# EAGLE board DA_uno_shield_0_2 (EAGLE 7.5.0)
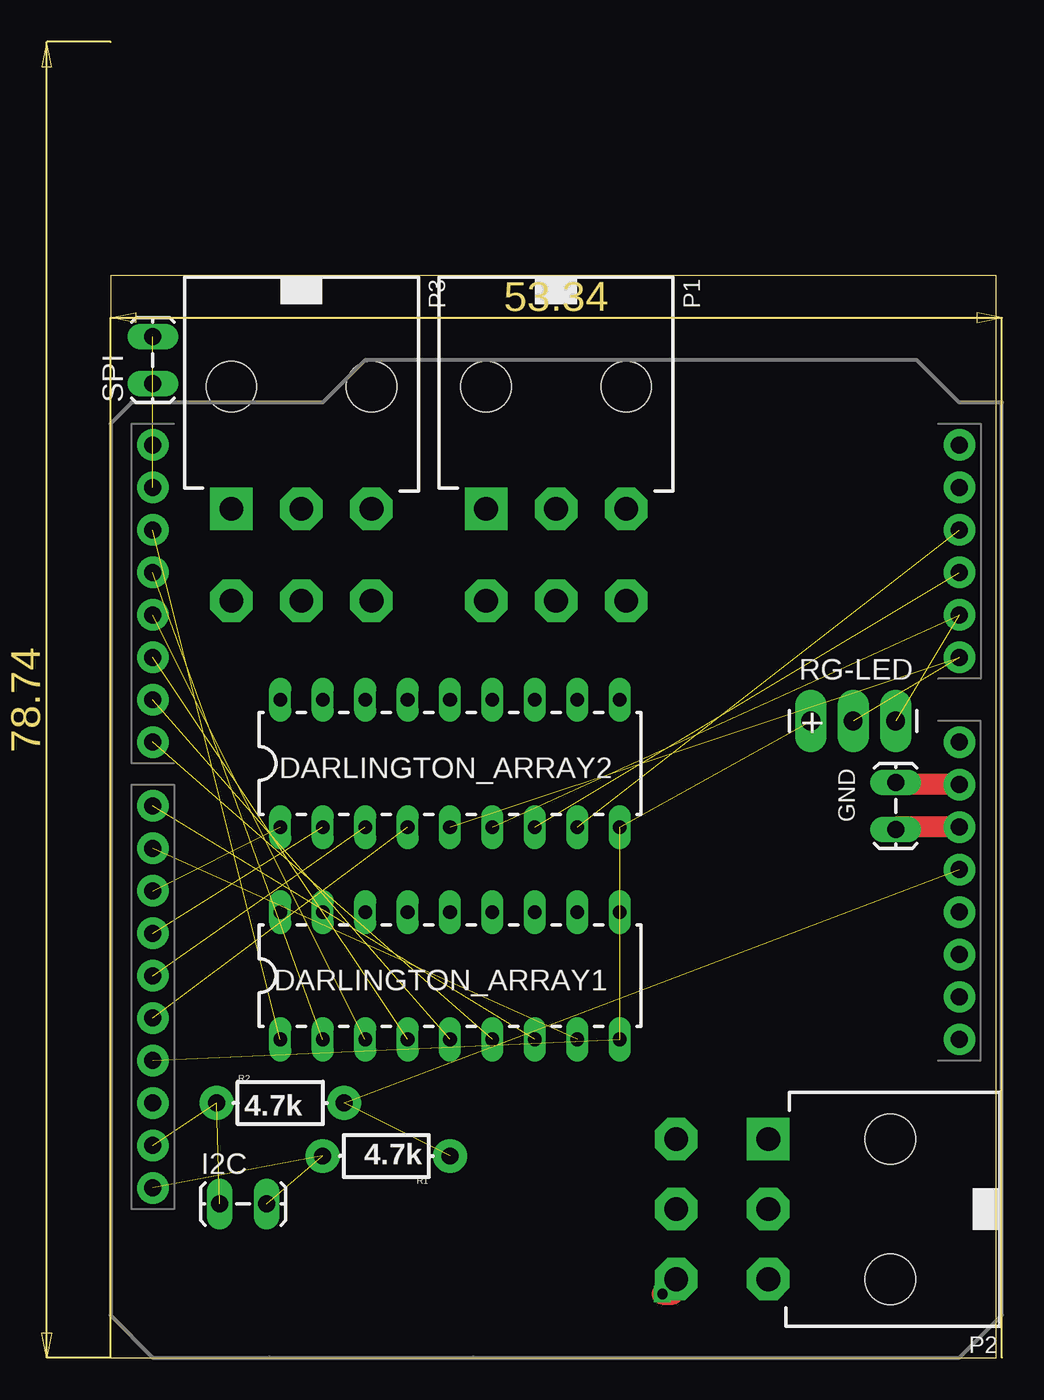
[diagram p0: board, top side]
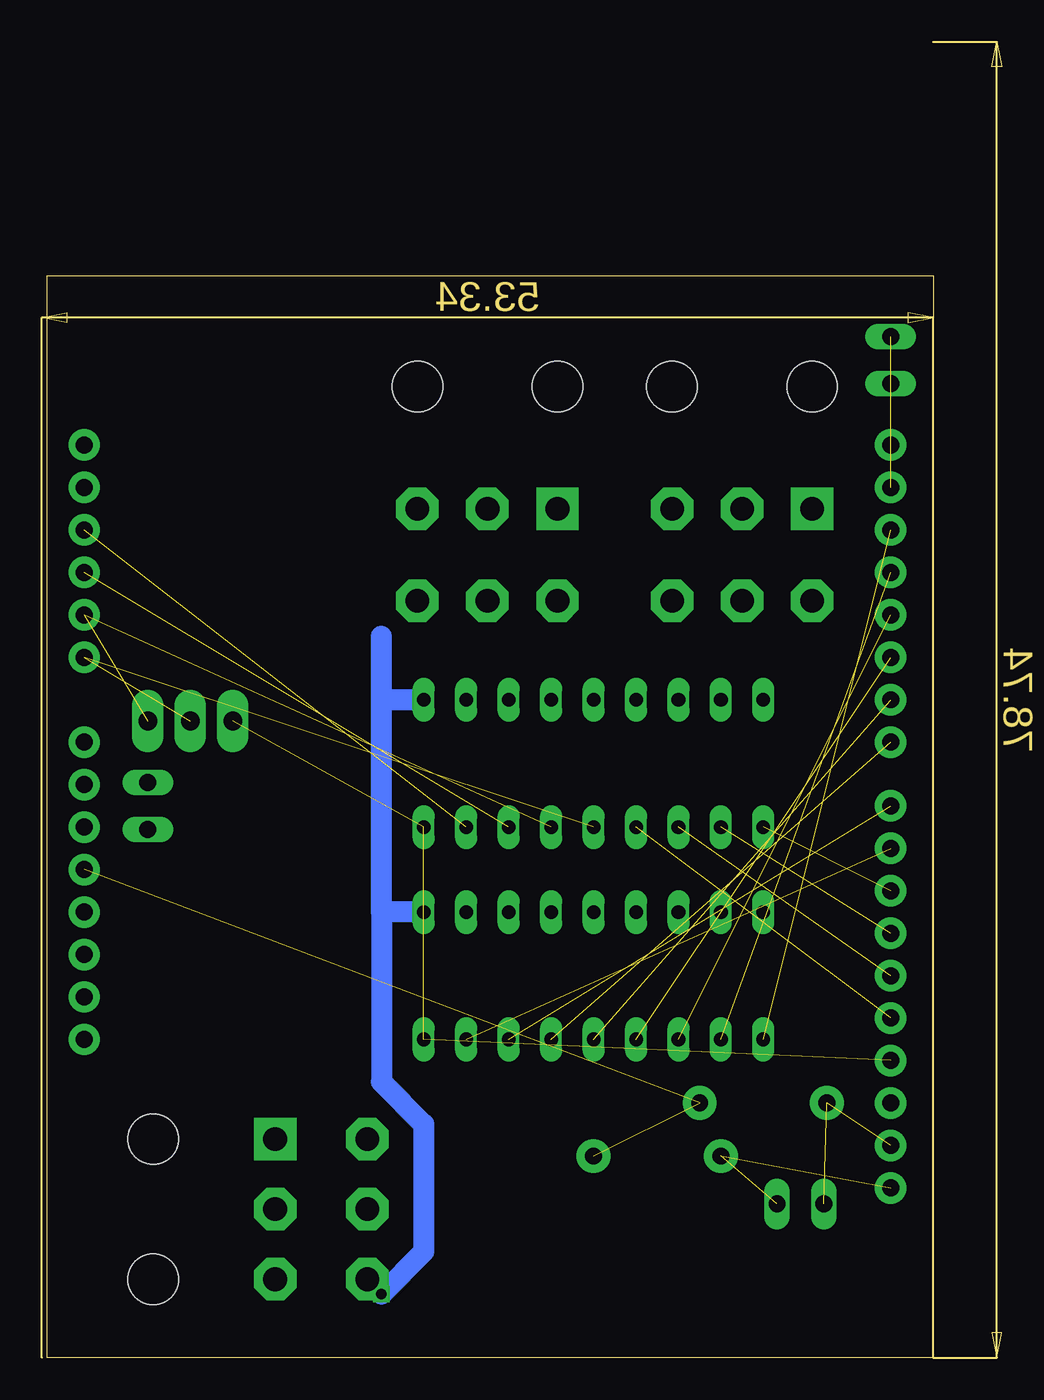
[diagram p1: board, bottom side, seen from below]

Size 53.01 x 64.76 mm. Coordinates in mm from the lower left corner, seen from the top.
Outline: 0,0 53.01,0 53.01,64.76 0,64.76 0,0
Copper layers (1*16): Top 0.035mm / dielectric 1.5mm / Bottom 0.035mm
Design rules "default": minimum track width 10mil, minimum drill 24mil, track to track 8mil, track to pad 8mil, pad to pad 8mil, via to via 8mil, smd to smd 8mil, copper to edge 40mil, drill to drill 8mil, minimum pad ring 10mil, minimum via ring 8mil, stop-mask expansion 4mil, vias tented up to drill 0mil, thermal gap 10mil
Net classes: 0 default: width 0.457 mm, drill 0.508 mm, clearance 0.381 mm; 1 GND: width 0.508 mm, drill 0.762 mm, clearance 0.508 mm

## Footprints (pad centres in the part's own frame; a part is rotated, then mirrored left to right if it is on the bottom)
UNO_R3_SHIELD = drill 1.016 pad 1.88: 3.3V 50.8,26.67; 5V 50.8,29.21; A0 50.8,41.91; A1 50.8,44.45; A2 50.8,46.99; A3 50.8,49.53; A4 50.8,52.07; A5 50.8,54.61; AREF 2.54,15.24; D2 2.54,49.53; D3 2.54,46.99; D4 2.54,44.45; D5 2.54,41.91; D6 2.54,39.37; D7 2.54,36.83; D8 2.54,33.02; D9 2.54,30.48; D10 2.54,27.94; D11 2.54,25.4; D12 2.54,22.86; D13 2.54,20.32; GND@0 50.8,31.75; GND@1 50.8,34.29; GND@2 2.54,17.78; IOREF 50.8,21.59; NC 50.8,19.05; RES 50.8,24.13; RX 2.54,54.61; SCL 2.54,10.16; SDA 2.54,12.7; TX 2.54,52.07; VIN 50.8,36.83
DIL18 = drill 0.813 long: 1 -10.16,-3.81; 2 -7.62,-3.81; 3 -5.08,-3.81; 4 -2.54,-3.81; 5 0,-3.81; 6 2.54,-3.81; 7 5.08,-3.81; 8 7.62,-3.81; 9 10.16,-3.81; 10 10.16,3.81; 11 7.62,3.81; 12 5.08,3.81; 13 2.54,3.81; 14 0,3.81; 15 -2.54,3.81; 16 -5.08,3.81; 17 -7.62,3.81; 18 -10.16,3.81
1X02_LOCK_LONGPADS = drill 1.016 long: 1 -0.127,0; 2 2.667,0
39-30-?06? = drill 1.422 pad 2.54 square: 1 4.191,0 | drill 1.422 pad 2.54 octagon: 2 0,0; 3 -4.191,0; 4 4.191,5.512; 5 0,5.512; 6 -4.191,5.512 | hole 3: -4.191,-7.3; 4.191,-7.3
AXIAL-0.3-KIT = drill 1.016 pad 2.032: P$1 -3.81,0; P$2 3.81,0
1X03_LONGPADS = drill 1.118 pad 1.88 long: 1 0,0; 2 2.54,0; 3 5.08,0

## Placement (x,y rotation side)
ARDUINO  ARDUINO_R3_SHIELD  [UNO_R3_SHIELD]  0,0 0 top
DARLINGTON_ARRAY1  [DIL18]  20.32,22.86 0 top
DARLINGTON_ARRAY2  [DIL18]  20.32,35.56 0 top
GND  [1X02_LOCK_LONGPADS]  46.99,31.75 90 top
I2C  [1X02_LOCK_LONGPADS]  6.67,9.21 0 top
P1  39-30-06?_S  [39-30-?06?]  26.67,50.8 180 top
P2  39-30-06?_S  [39-30-?06?]  39.37,8.89 90 top
P3  39-30-06?_S  [39-30-?06?]  11.43,50.8 180 top
P4  39-30-06?_S  [39-30-?06?]  -73.66,13.97 0 top  (outside the outline)
R1  4.7k  [AXIAL-0.3-KIT]  16.51,12.06 180 top
R2  4.7k  [AXIAL-0.3-KIT]  10.16,15.24 0 top
RG-LED  [1X03_LONGPADS]  41.91,38.1 0 top
SPI  [1X02_LOCK_LONGPADS]  2.54,58.42 90 top

## Library data of the parts
ARDUINO = Nathans-Arduinos
DARLINGTON_ARRAY1 DARLINGTON_ARRAY2 = SparkFun-PowerIC
GND I2C RG-LED SPI = SparkFun-Connectors
P1-P4 = con-molex-mini-fit
R1 R2 = SparkFun-Resistors

## Nets
5V: ARDUINO.5V R1.P$1 R2.P$2
A0: ARDUINO.A0 DARLINGTON_ARRAY2.5 RG-LED.2
A1: ARDUINO.A1 DARLINGTON_ARRAY2.6 RG-LED.3
A2: ARDUINO.A2 DARLINGTON_ARRAY2.7
A3: ARDUINO.A3 DARLINGTON_ARRAY2.8
A4: ARDUINO.A4
A5: ARDUINO.A5
D10: ARDUINO.D10 DARLINGTON_ARRAY2.1
D11: ARDUINO.D11 DARLINGTON_ARRAY2.2
D12: ARDUINO.D12 DARLINGTON_ARRAY2.3
D13: ARDUINO.D13 DARLINGTON_ARRAY2.4
GND: ARDUINO.GND@2 DARLINGTON_ARRAY1.9 DARLINGTON_ARRAY2.9 RG-LED.1
N$1: DARLINGTON_ARRAY1.14
N$2: DARLINGTON_ARRAY1.13
N$3: DARLINGTON_ARRAY1.12
N$4: DARLINGTON_ARRAY1.11
N$5: ARDUINO.D6 DARLINGTON_ARRAY1.5
N$6: ARDUINO.D7 DARLINGTON_ARRAY1.6
N$7: ARDUINO.D8 DARLINGTON_ARRAY1.7
N$8: ARDUINO.D9 DARLINGTON_ARRAY1.8
N$21: ARDUINO.GND@1 GND.2
N$22: ARDUINO.GND@0 GND.1
N$30: DARLINGTON_ARRAY2.18
N$33: ARDUINO.D2 DARLINGTON_ARRAY1.1
N$34: DARLINGTON_ARRAY1.18
N$35: DARLINGTON_ARRAY1.17
N$36: DARLINGTON_ARRAY1.16
N$37: DARLINGTON_ARRAY1.15
N$38: ARDUINO.D3 DARLINGTON_ARRAY1.2
N$39: ARDUINO.D4 DARLINGTON_ARRAY1.3
N$40: ARDUINO.D5 DARLINGTON_ARRAY1.4
N$41: DARLINGTON_ARRAY2.17
N$42: DARLINGTON_ARRAY2.16
N$43: DARLINGTON_ARRAY2.15
N$44: DARLINGTON_ARRAY2.14
N$45: DARLINGTON_ARRAY2.13
N$46: DARLINGTON_ARRAY2.12
N$47: DARLINGTON_ARRAY2.11
RX: ARDUINO.RX SPI.1
SCL: ARDUINO.SCL I2C.2 R1.P$2
SDA: ARDUINO.SDA I2C.1 R2.P$1
TX: ARDUINO.TX SPI.2
VCC: DARLINGTON_ARRAY1.10 DARLINGTON_ARRAY2.10
VIN: ARDUINO.VIN

## Tracks (layer width: path | path; a pad name or v marks a point on that pad's centre or on a via)
5V  (2 unrouted)
A0  (2 unrouted)
A1  (2 unrouted)
A2  (1 unrouted)
A3  (1 unrouted)
D10  (1 unrouted)
D11  (1 unrouted)
D12  (1 unrouted)
D13  (1 unrouted)
GND  (3 unrouted)
N$5  (1 unrouted)
N$6  (1 unrouted)
N$7  (1 unrouted)
N$8  (1 unrouted)
N$21
  Top 1.27: ARDUINO.GND@1 46.99,34.29 GND.2
N$22
  Top 1.27: ARDUINO.GND@0 46.99,31.75 GND.1
N$33  (1 unrouted)
N$38  (1 unrouted)
N$39  (1 unrouted)
N$40  (1 unrouted)
RX  (1 unrouted)
SCL  (2 unrouted)
SDA  (2 unrouted)
TX  (1 unrouted)
VCC  (via drill 0.6)
  Top 1.27: v33.02,3.81 33.66,3.81
  Bottom 1.27: DARLINGTON_ARRAY1.10 33.02,26.67 | 33.02,26.67 33.02,39.37 | 33.02,39.37 33.02,43.18 | DARLINGTON_ARRAY2.10 33.02,39.37 | 33.02,26.67 33.02,16.51 30.48,13.97 30.48,6.35 v33.02,3.81

## Text on the board
tNames: +